# Altium PCB Power.PcbDoc
Units mil, origin at the board's own origin, x right, y up, seen from the top; angles counter-clockwise.
Board outline 4935 x 2460 mil, 2 copper layers (Top Layer, Bottom Layer); 21 components, 9 nets, 53 pads, 18 vias.
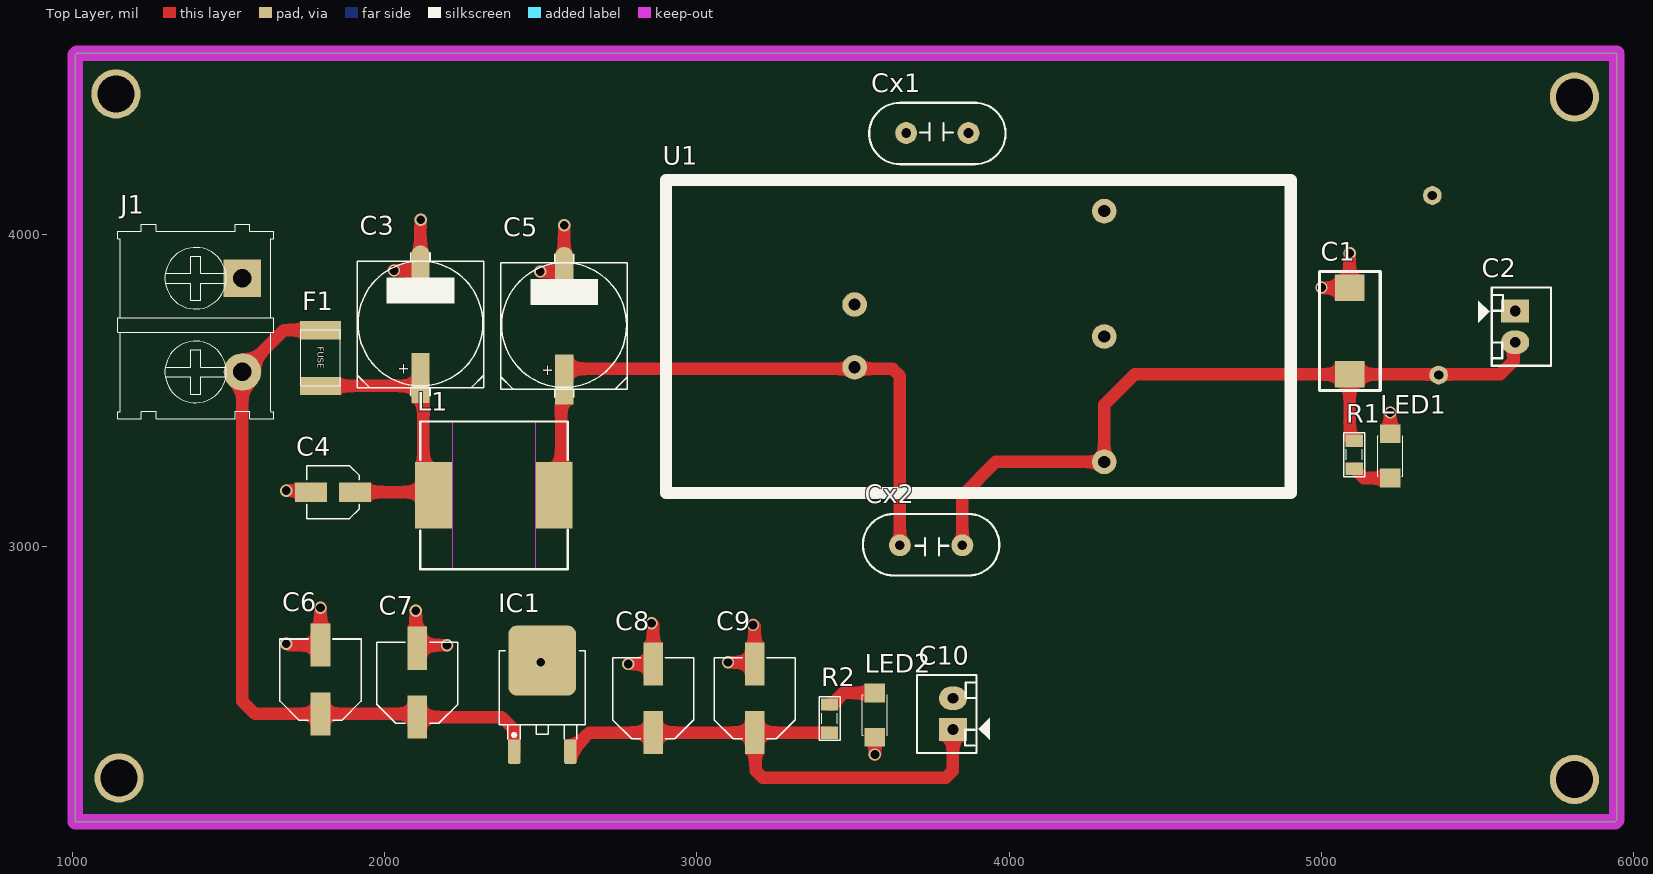
[diagram p0: Top Layer view]
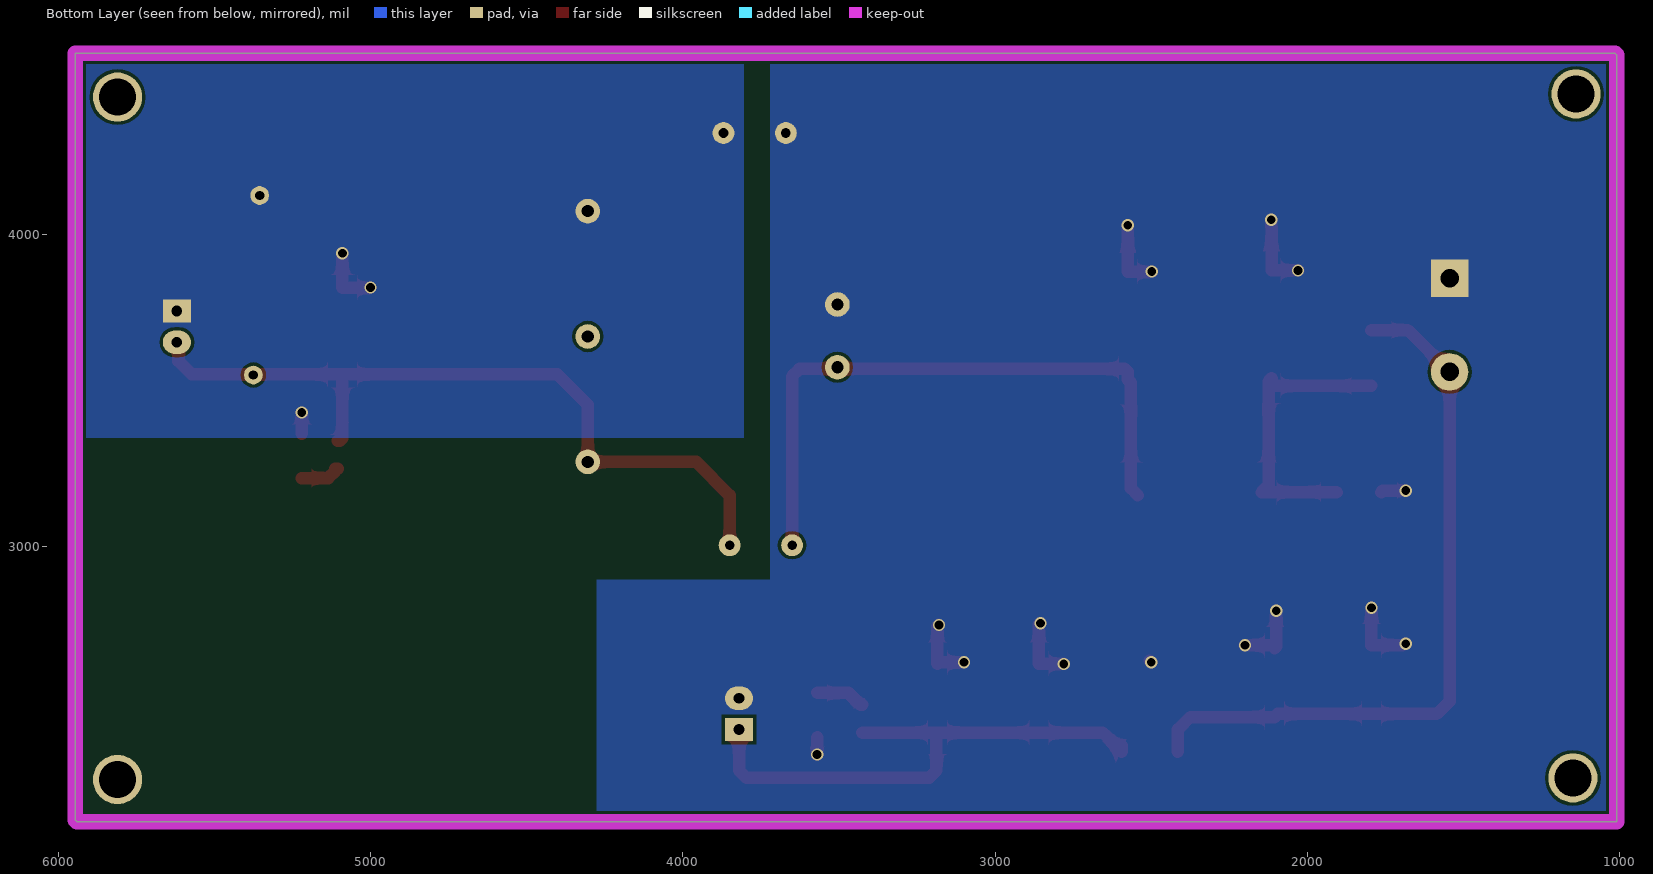
[diagram p1: Bottom Layer view, seen from below]
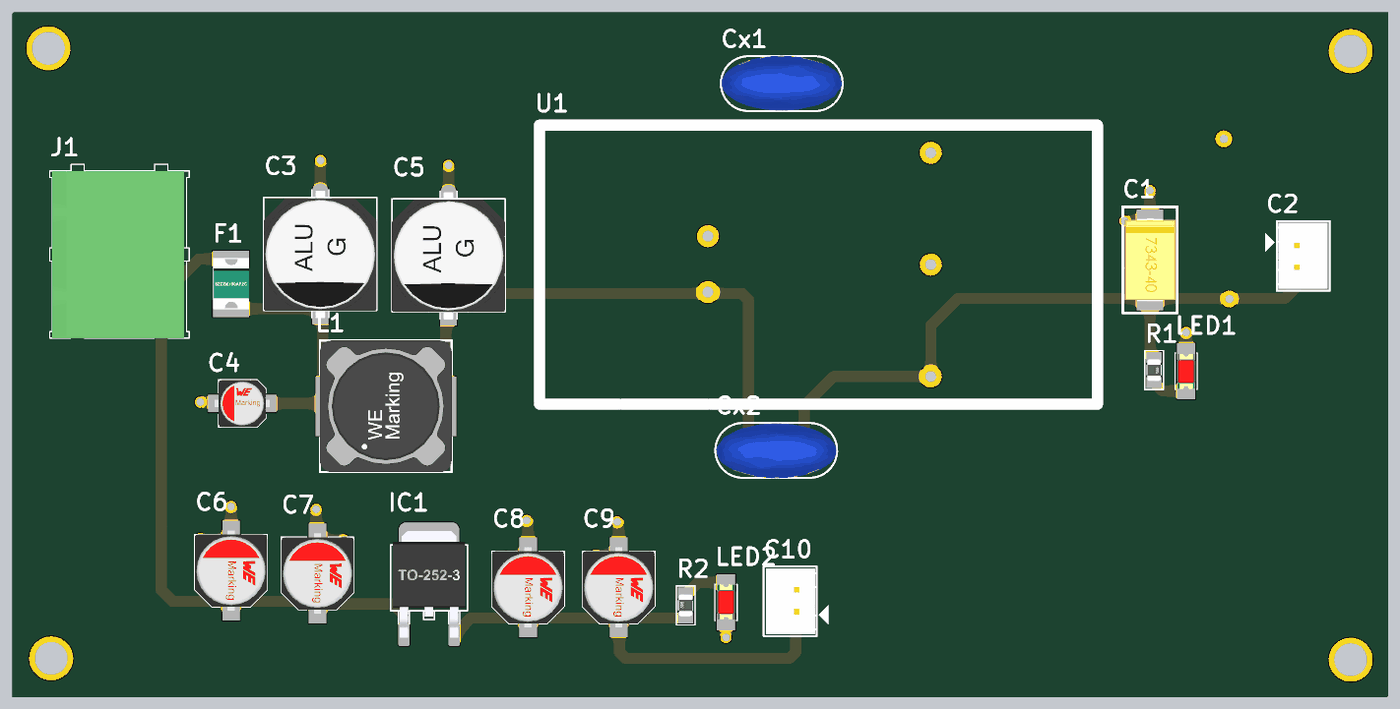
[diagram p2: 3D render of the assembled board from above, using the file's embedded part models]

## Layer stack, top to bottom
Top Solder: solder mask 0.4, Solder Resist, Dk 3.5
Top Layer: signal copper 1.4
Dielectric 1: dielectric 12.6, FR-4, Dk 4.8
Bottom Layer: signal copper 1.4
Bottom Solder: solder mask 0.4, Solder Resist, Dk 3.5

## Board outline
1010,2120 5940,2120 5945,2125 5945,4580 1015,4580 1010,4575

## Design rules (kind name [scope] priority, off if disabled: settings)
Clearance [All] p1: gap=10 ignorepadtopadclearanceinfootprint=FALSE
PlaneConnect [All] p1: planeconnectstyle=Direct reliefexpansion=20 reliefentries=4 reliefconductorwidth=10 reliefairgap=10
PolygonConnect [All] p1: connectstyle=Direct reliefconductorwidth=10 reliefentries=4 polygonreliefangle="90 Angle" airgapwidth=10
RoutingVias [All] p1: holewidth=28 width=39.37 viastyle="Through Hole" minholewidth=28 minwidth=39.37 maxholewidth=28 maxwidth=39.37
SolderMaskExpansion [All] p1: expansion=4 istentingtop=FALSE
Width [All] p1: maxlimit=40 minlimit=20 preferedwidth=30
29 further rules are at their usual default settings.

## Components (designator, comment, footprint, x,y, rotation, side; value= is the part's Value field where it differs from the comment)
C1 "470uF/10V" TANTALUM-7343 5090,3560 r90 top
C2 "Header2" Header2 5620,3755 r270 top
C3 "330uF/50V" CAP-ALU-SMD-G 2115,3715 r90 top
C4 "1uF/50V" CAP-ALU-SMD-4.5x5x1.4 1835,3175 r180 top
C5 "330uF/50V" CAP-ALU-SMD-G 2575,3710 r90 top
C6 "220uF/50V" CAP-ALU-SMD-6.3x7.7x2.2 1795,2575 r90 top
C7 "220uF/50V" CAP-ALU-SMD-6.3x7.7x2.2 2105,2565 r90 top
C8 "220uF/50V" CAP-ALU-SMD-6.3x7.7x2.2 2860,2515 r90 top
C9 "220uF/50V" CAP-ALU-SMD-6.3x7.7x2.2 3185,2515 r90 top
C10 "Header2" Header2 3820,2415 r90 top
Cx1 "1nF/2kV" CN2-B 3770,4330 r0 top value=33pF
Cx2 "1nF/2kV" CN2-B 3750,3000 r180 top value=33pF
F1 "F3A" "FUSE_SMD 1812" 1797,3607 r270 top value=Fuse
IC1 "LM7805" TO252-123 2505,2490 r0 top
J1 "KF2" KF2-7.62 1395,3710 r270 top
L1 "4.7uH" L-SMD-M-12x10 2350,3165 r90 top
LED1 "LED" LED-1206-Red 5220,3220 r90 top value="LED 3 - 5 ly 2 Colour"
LED2 "LED" LED-1206-Red 3570,2532 r270 top value="LED 3 - 5 ly 2 Colour"
R1 "470" RES-SMD-0805 5105,3295 r270 top
R2 "470" RES-SMD-0805 3425,2450 r90 top
U1 "SLW05B-05" SLW05B-05 2899.21,3164.85 r0 top

## Footprints (in the part's own frame and the unit in brackets; to place one, negate y for a bottom-side part, rotate by r counter-clockwise, add the part's x,y. Pads: shape width x height; smd on the part's side, far side on the other; paste and mask are expansions set on the pad)
CAP-ALU-SMD-4.5x5x1.4 [mm]
  rect 2.6x1.6 smd: 1(-1.8,0) 2(1.8,0)
  silkscreen extent -2.15,-2.15 2.15,2.15, body extent -2.5,-2.15 2.5,2.15, height 5.45
CAP-ALU-SMD-6.3x7.7x2.2 [mm]
  rect 3.5x1.6 smd: 1(-2.8,0) 2(2.8,0)
  silkscreen extent -3.3,-3.3 3.3,3.3, body extent -3.65,-3.3 3.65,3.3, height 7.65
CAP-ALU-SMD-G [mil]
  rect 160x59.06 smd: 1(-175,0)
  oval 160x59.06 smd: 2(170,0)
  silkscreen extent -231,-203 226,203, body extent -233,-203 223,203, height 402
CN2-B [mil]
  round 70 hole 31: 1(-100,-5) 2(100,-5)
  silkscreen extent -218,-105 218,92, body extent -216,-103 216,93, height 492
"FUSE_SMD 1812" [mm]
  rect 1.5x3.3 smd: 1(-2.199,-0.051) 2(2.337,-0.051)
  silkscreen extent -2.25,-1.65 2.34,1.55, body extent -2.22,-1.63 2.28,1.57, height 0.86
Header2 [mil] "CON2"
  rect 75x90 hole 34: 1(0,0)
  oval 75x90 hole 34: 2(100,0)
  silkscreen extent -75,-118 175,115, body extent -68,-70 168,107, height 236
KF2-7.62 [mil]
  rect 120x120 hole 59.06: 1(-150,150)
  round 120 hole 59.06: 2(150,150)
  silkscreen extent -324,-250 300,250, body extent -300,-241 300,231, height 337
L-SMD-M-12x10 [mm] "WE-PDA SMD Shielded Power Inductor, 1210"
  rect 5.4x3 smd: 1(0,4.9) 2(0,-4.9)
  Top Layer keep-out region: -6,-3.4 6,-3.4 6,3.4 -6,3.4
  silkscreen extent -6,-6 6,6, body extent -6,-6 6,6, height 9.7
LED-1206-Red [mil]
  rect 60x65 smd: 1(0,0) 2(142,0)
  silkscreen extent 6,-40 136,40, body extent 7,-31 133,32, height 43
RES-SMD-0805 [mil]
  rect 39.37x55 smd: 1(-45,0) 2(45,0)
  silkscreen extent -70,-34 70,33, body extent -39,-25 39,25, height 31
SLW05B-05 [mm]
  round 2 hole 1: NO(35.687,12.918) V+(35.687,2.718) V-(35.687,23.118) Vin+(15.387,10.418) Vin-(15.387,15.518)
  silkscreen extent 0.05,0.19 50.87,25.64
TANTALUM-7343 [mm]
  rect 2.16x2.41 smd: 1(-0.203,0) 2(6.833,0)
  silkscreen extent -1.52,-2.49 8.15,2.46, body extent -0.5,-2.33 7.1,2.27, height 4
TO252-123 [mm]
  round 0.5 on Mech15: 0(0,0)
  rrect25% 1x2 smd: 1(-2.285,-3.7) 3(2.285,-3.7)
  rrect25% 5.5x5.7 smd: 2(0,3.7)
  silkscreen extent -3.5,-2.7 3.5,4.5, body extent -3.3,-3.95 3.3,5.76, height 2.31

## Part data
C1: library part CN-TANTALUM-SMD
C2 C10: "Header IDC, 2 x 1 Pin Vertical 2.54mm Pitch (Non-Boxed, Male)", Manufacturer="W¨¹rth Elektronik eiSos GmbH", partNo=613002143121, ComponentLink1 Description=Manufacturer, ComponentLink1URL=http://www.we-online.com, ComponentLink2 Description=Datasheet, ComponentLink2URL=http://katalog.we-online.de/em/datasheet/6130xx143121.pdf, Created by="Karrer Zheng", Created Date="29 March 2013", NoPins=02
C3 C4 C5 C6 C7 C8 C9: library part CN-ALU-SMD, "Polarized Capacitor (Axial)", LatestRevisionDate=17-Jul-2002, LatestRevisionNote="Re-released for DXP Platform.", PackageReference=POLAR0.8, Published=8-Jun-2000, Publisher="Altium Limited"
Cx1 Cx2: library part CN
F1: library part Fuse, "Fuse", Designed by=VanDungEvn
IC1: library part LM78xx, "Positive Voltage Regulator", ComponentLink1Description="Manufacturer Link", ComponentLink1URL=http://www.st.com/, ComponentLink2Description=Datasheet, ComponentLink2URL=http://www.st.com/stonline/products/literature/ds/2146/l78m05c.pdf, DatasheetVersion=Apr-1994, LatestRevisionDate=17-Jul-2002, LatestRevisionNote="Re-released for DXP Platform.", Note="Tab is connected to pin 3 (GND).", PackageDescription="TO, Thru-Hole, Vertical, Heatsink Mounted; 3 In-Line Leads; Pitch 2.54 mm; Pin sequence 1, 3, 2", PackageReference=ISOWATT220AB, PackageVersion=Jul-1998, Published=24-Aug-2001, Publisher="Altium Limited"
J1: Manufacturer="Würth Elektronik eiSos GmbH", partNo=691103110002, ComponentLink1 Description=Manufacturer, ComponentLink1URL=http://www.we-online.com, ComponentLink2 Description=Datasheet, ComponentLink2URL=http://katalog.we-online.de/em/datasheet/6911031100xx.pdf, Created by="Karrer Zheng", Created Date="29 October 2013", NoPins=2
L1: library part L-SMD-1, Inductance="1.0 μH", Manufacturer="Wurth Elektronik", partNo=78477010, ComponentLink1Description=Manufacturer, ComponentLink1URL=http://www.we-online.de, ComponentLink2Description=Datasheet, ComponentLink2URL=http://katalog.we-online.de/pbs/datasheet/78477010.pdf, Created by="Baojun Chen", Created Date=Nov.2015
LED1 LED2: library part "LED SMD"
R1 R2: library part Res-SMD, "Resistor", Manufacturer="Generic Components", Class=Passive, Published=08/06/2000, Publisher="Altium Hobart Technology Centre"
U1: library part "Module DC-DC 220/5V/5W"

## Free pads (board coordinates)
  round 157.48 hole 118.11: 4(1140,4450) 4(1150,2260) 4(5810,2255) 4(5810,4440)
  round 60 hole 30: 5(5375,3550) 6(5355,4125)

## Via types
v1: diameter 39.37, hole 28, Top Layer to Bottom Layer, 18 vias

## Nets (pads, with @x,y where several pads share a name; then routed paths per layer and width w, separated by ;. In a path a pad name is that pad's centre, name@x,y a point inside that pad or via, vN(x,y) a via of type N, cw(c..) or ccw(c..) an arc to the next point about the centre after c; other vN are vias at no path point)
5V: C8.1 C9.1 C10.1 IC1.3 R2.1 | length 1772
  Top Layer w40: IC1.3 2594.96,2363.39 2595.28,2363.7 2614.33,2363.7 2655.39,2404.76 C8.1 C9.1 ; R2.1 3185.24,2405 C9.1 ; C10.1 3820,2283.43 3796.57,2260 3211.17,2260 3187.74,2283.43 3187.74,2402.02 C9.1
5V_MCU: C1.1 C2.2 Cx2.1 pad.5 R1.1 U1.V+ | length 2494.4
  Top Layer w40: Cx2.1 3850,3165 3956.85,3271.85 U1.V+ 4304.21,3454.21 4402,3552 C1.1 ; R1.1 5097.81,3340 5090,3347.82 C1.1 ; C2.2 5614.81,3649.81 5614.81,3594.81 5572,3552 C1.1
24V: C6.1 C7.1 F1.1 IC1.1 J1.2 | length 2338.4
  Top Layer w40: F1.1 1678.37,3693.58 1545,3560.21 J1.2 1545,2505 1585.24,2464.76 C6.1 2095,2464.76 C7.1 2375.24,2454.76 2414.72,2415.28 2414.72,2344.65 IC1.1
GND: C3.2 C4.2 C5.2 C6.2 C7.2 C8.2 C9.2 C10.2 Cx1.1 IC1.2 J1.1 LED2.2 U1.Vin- | length 1497.1
  Top Layer w40: v1(1685,2690) 1690,2690 1694.76,2685.24 C6.2 v1(1795,2805) ; v1(1685,3180) 1759.13,3180 C4.2 ; v1(2030,3885) C3.2 2115,4023.7 2116.16,4024.86 v1(2116.16,4047.52) ; v1(2100,2795) 2100,2680.24 C7.2 2114.76,2685 v1(2200,2685) ; v1(2498.75,3881.25) 2500,3880 C5.2 v1(2575,4030) ; v1(2500,2630) 2505,2635 IC1.2 ; v1(2780,2625) 2780.24,2625.24 C8.2 2860,2750 v1(2855,2755) ; v1(3100,2630) 3180.24,2630 C9.2 3185,2745 v1(3180,2750) ; v1(3570,2335) LED2.2
NetC3_1: C3.1 C4.1 F1.2 L1.1 | length 958.9
  Top Layer w40: F1.2 2105.47,3515 2115,3524.53 C3.1 2124.53,3530.47 2124.53,3197.56 2147.09,3175 C4.1
NetLED1_1: LED1.1 R1.2 | length 131.1
  Top Layer w40: R1.2 5112.19,3250 5112.5,3249.69 5112.5,3243.43 5135.93,3220 LED1.1
NetLED2_1: LED2.1 R2.2 | length 160.3
  Top Layer w40: R2.2 3432.19,2495 3469.19,2532 LED2.1
P_GND: C1.2 C2.1 Cx1.2 LED1.2 pad.6 U1.V- | length 269.4
  Top Layer w40: v1(5000,3830) 5001,3829 C1.2 v1(5090,3940) ; LED1.2 v1(5220,3430)
VIN: C5.1 Cx2.2 L1.2 U1.Vin+ | length 2032.7
  Top Layer w40: L1.2 2565.47,3187.56 2565.47,3525.47 C5.1 ; C5.1@2575,3545.47 2575,3560.47 2584.53,3570 3500,3570 U1.Vin+ 3510,3570 3626.57,3570 3650,3546.57 Cx2.2
pads on no net: IC1.0 U1.NO

## Polygon pours and split planes (outlines as drawn)
P_GND on Bottom Layer "P_GND_L02_P001" (solid, pour order 1): 3805,4550 3805,3350 5920,3350 5920,4555
GND on Bottom Layer "GND_L02_P000" (solid, pour order 0): 1035,4555 3720,4555 3720,2895 4275,2895 4275,2145 1040,2145

## Keep-outs
Keep-Out Layer:
  the board outline again, w50

## Text inside footprints (layer, text, board x,y; h text height)
C3: Top Overlay "+" at 2076.61,3549.65 h35 r90
C5: Top Overlay "+" at 2536.61,3544.65 h35 r90
F1: Top Overlay "FUSE" at 1786,3641 h20 r270